# EAGLE board Snare (EAGLE 9.2.2)
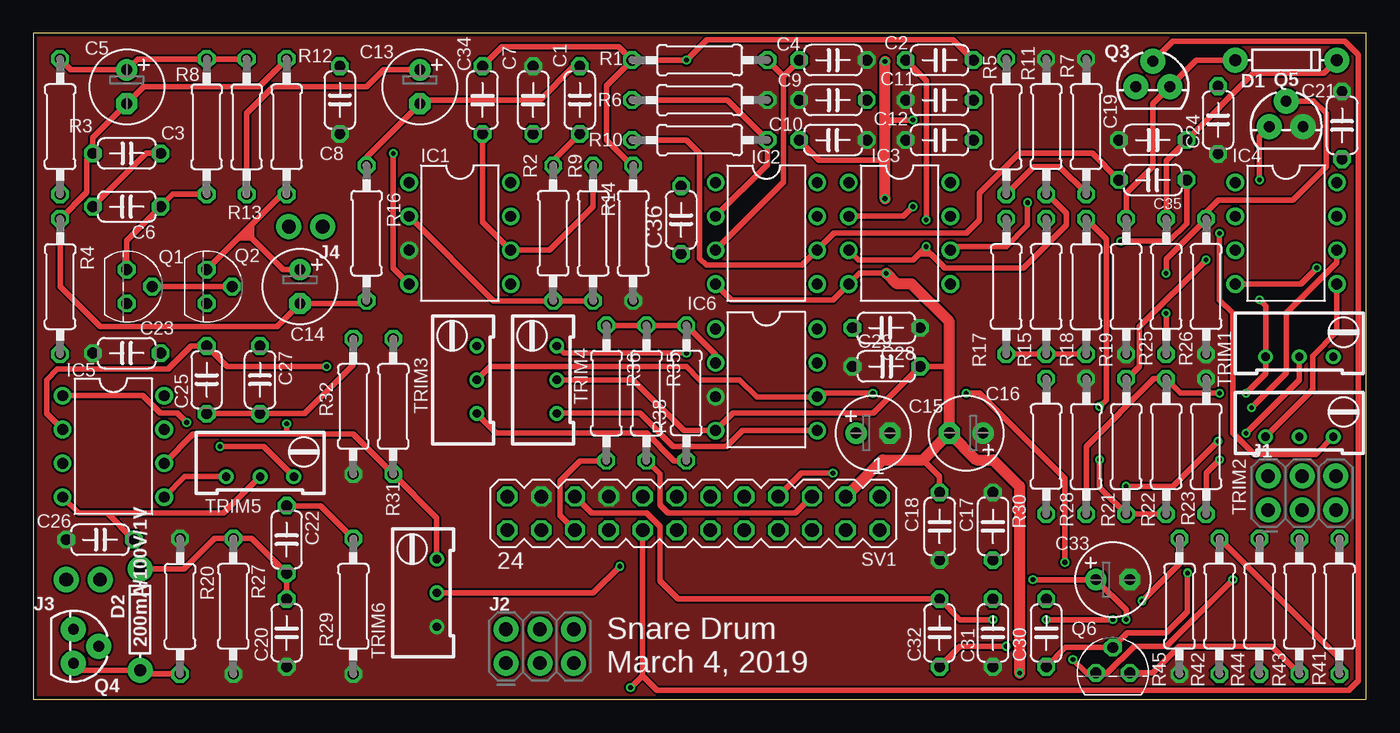
[diagram p0: board, top side]
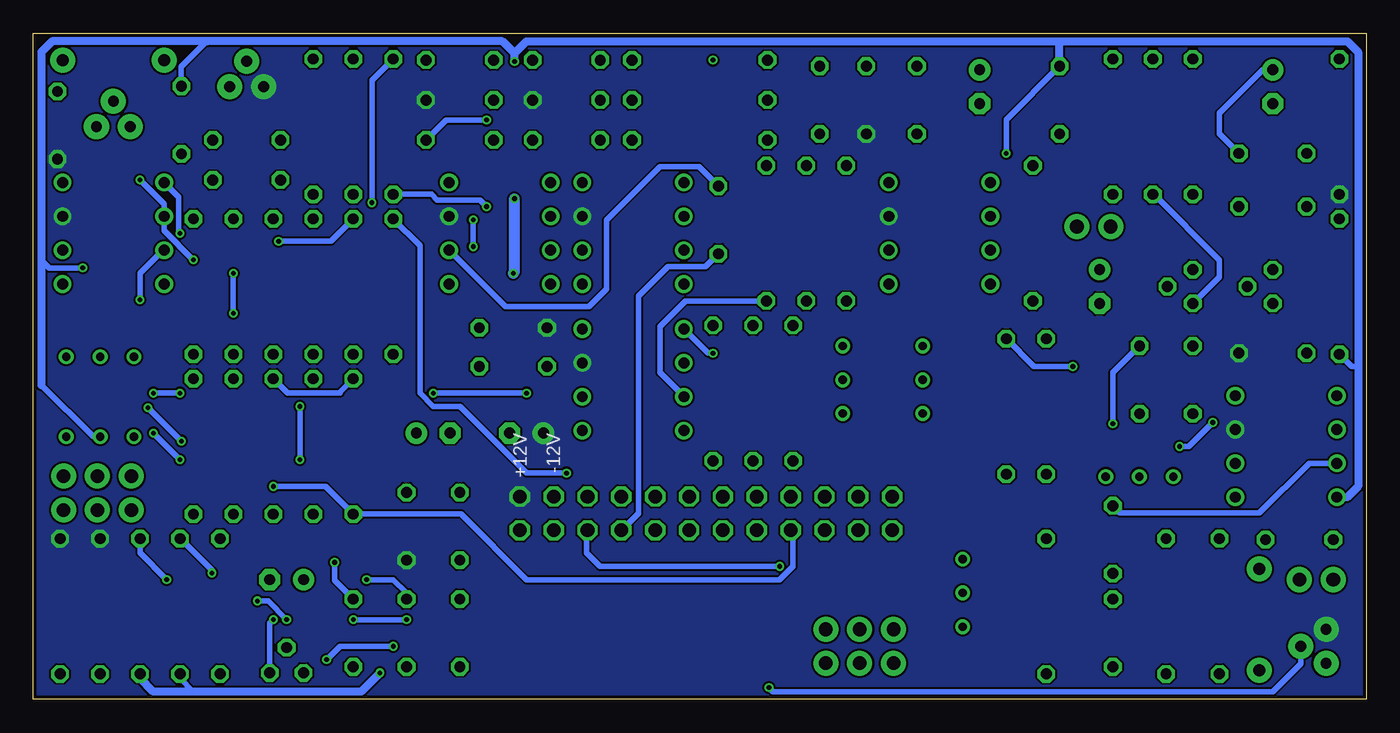
[diagram p1: board, bottom side, seen from below]

Size 100 x 50 mm. Coordinates in mm from the lower left corner, seen from the top.
Outline: 0,0 100,0 100,50 0,50 0,0
Copper layers (1*16): Top 0.035mm / dielectric 1.5mm / Bottom 0.035mm
Design rules "SeeedStudio_2layer_DRU_no_angle_20140221": minimum track width 6mil, minimum drill 12mil, track to track 6mil, track to pad 6mil, pad to pad 6mil, via to via 6mil, smd to smd 0mil, copper to edge 10mil, drill to drill 10mil, minimum pad ring 10mil, minimum via ring 6mil, stop-mask expansion 2mil, vias tented up to drill 100mil, thermal gap 10mil

## Footprints (pad centres in the part's own frame; a part is rotated, then mirrored left to right if it is on the bottom)
C050-024X044 = drill 0.813 octagon: 1 -2.54,0; 2 2.54,0
E2,5-6 = drill 0.813 pad 1.6: + -1.27,0 | drill 0.813 pad 1.6 octagon: - 1.27,0
DIODE-1N4148 = drill 0.9 pad 1.88: A -3.81,0; C 3.81,0
DIL08 = drill 0.813 pad 1.27: 1 -3.81,-3.81; 2 -1.27,-3.81; 3 1.27,-3.81; 4 3.81,-3.81; 5 3.81,3.81; 6 1.27,3.81; 7 -1.27,3.81; 8 -3.81,3.81
2X3-NS = drill 1.016 pad 1.88: 1 -2.54,-1.27; 2 -2.54,1.27; 3 0,-1.27; 4 0,1.27; 5 2.54,-1.27; 6 2.54,1.27
1X02_NO_SILK = drill 1.016 pad 1.88: 1 0,0; 2 2.54,0
TO92 = drill 0.813 octagon: 1 1.27,0; 2 0,1.905; 3 -1.27,0
TO-92 = drill 0.813 pad 1.88: 1 -1.27,0; 2 0,1.905; 3 1.27,0
0207/10 = drill 0.813 octagon: 1 -5.08,0; 2 5.08,0
MA12-2 = drill 1.016 octagon: 1 -13.97,-1.27; 2 -13.97,1.27; 3 -11.43,-1.27; 4 -11.43,1.27; 5 -8.89,-1.27; 6 -8.89,1.27; 7 -6.35,-1.27; 8 -6.35,1.27; 9 -3.81,-1.27; 10 -3.81,1.27; 11 -1.27,-1.27; 12 -1.27,1.27; 13 1.27,-1.27; 14 1.27,1.27; 15 3.81,-1.27; 16 3.81,1.27; 17 6.35,-1.27; 18 6.35,1.27; 19 8.89,-1.27; 20 8.89,1.27; 21 11.43,-1.27; 22 11.43,1.27; 23 13.97,-1.27; 24 13.97,1.27
RTRIM64W = drill 0.61: 1 1.27,-2.54; 2 1.27,0; 3 1.27,2.54

## Placement (x,y rotation side)
C1  0.1uF  [C050-024X044]  41,45 90 top
C2  1nF  [C050-024X044]  68,48 0 top
C3  10uF  [E2,5-6]  7,46 270 top
C4  1nF  [C050-024X044]  60,48 0 top
C5  0.1uF  [C050-024X044]  7,41 0 top
C6  0.1uF  [C050-024X044]  7,37 180 top
C7  0.1uF  [C050-024X044]  37.5,45 270 top
C8  0.1uF  [C050-024X044]  23,45 90 top
C9  0.1uF  [C050-024X044]  60,45 0 top
C10  0.1uF  [C050-024X044]  60,42 180 top
C11  0.1uF  [C050-024X044]  68,45 0 top
C12  0.1uF  [C050-024X044]  68,42 0 top
C13  10uF  [E2,5-6]  29,46 270 top
C14  10uF  [E2,5-6]  20,31 270 top
C15  10uF  [E2,5-6]  63,20 0 top
C16  10uF  [E2,5-6]  70,20 180 top
C17  1u  [C050-024X044]  72,13 270 top
C18  1u  [C050-024X044]  68,13 270 top
C19  0.33uF  [C050-024X044]  84,42 0 top
C20  0.33uF  [C050-024X044]  19,5 90 top
C21  0.1uF  [C050-024X044]  98.2,43.1 270 top
C22  0.1uF  [C050-024X044]  19,12 270 top
C23  0.1uF  [C050-024X044]  7,26 180 top
C24  0.1uF  [C050-024X044]  88.9,43.5 90 top
C25  33nF  [C050-024X044]  13,24 90 top
C26  0.1uF  [C050-024X044]  5,12 0 top
C27  33nF  [C050-024X044]  17,24 270 top
C28  0.1uF  [C050-024X044]  64,27.9 180 top
C29  0.1uF  [C050-024X044]  64,25 0 top
C30  2.2u  [C050-024X044]  76,5 90 top
C31  1u  [C050-024X044]  72,5 270 top
C32  2.2u  [C050-024X044]  68,5 90 top
C33  10uF  [E2,5-6]  81,9 0 top
C34  0.1uF  [C050-024X044]  33.7,45 270 top
C35  0.1uF  [C050-024X044]  84,39 180 top
C36  0.1uF  [C050-024X044]  48.6,36 90 top
D1  200mA/100V/1V  [DIODE-1N4148]  94,48 0 top
D2  200mA/100V/1V  [DIODE-1N4148]  8,6 90 top
IC1  LM741P  [DIL08]  32,35 270 top
IC2  LM741P  [DIL08]  55,35 270 top
IC3  LM741P  [DIL08]  65,35 270 top
IC4  LM741P  [DIL08]  94,35 270 top
IC5  LM741P  [DIL08]  6,19 270 top
IC6  LM741P  [DIL08]  55,24 270 top
J1  [2X3-NS]  95.2,15.5 0 top
J2  [2X3-NS]  38,4 0 top
J3  [1X02_NO_SILK]  5,9 180 top
J4  [1X02_NO_SILK]  21.7,35.5 180 top
Q1  2N3904  [TO92]  7,31 270 top
Q2  2N3904  [TO92]  13,31 270 top
Q3  2N2222A  [TO-92]  84,46 0 top
Q4  2N2222A  [TO-92]  3,4 270 top
Q5  J176  [TO-92]  94,43 0 top
Q6  2N3904  [TO92]  81,2 0 top
R1  15k  [0207/10]  50,48 0 top
R2  47k  [0207/10]  39,35 90 top
R3  2k  [0207/10]  2,43 90 top
R4  2k  [0207/10]  2,31 270 top
R5  15k  [0207/10]  76,43 90 top
R6  2k  [0207/10]  50,45 0 top
R7  4.7k  [0207/10]  79,43 90 top
R8  680k  [0207/10]  13,43 270 top
R9  100k  [0207/10]  42,35 270 top
R10  10k  [0207/10]  50,42 0 top
R11  2k  [0207/10]  73,43 270 top
R12  4.7k  [0207/10]  16,43 270 top
R13  1k  [0207/10]  19,43 90 top
R14  100k  [0207/10]  45,35 270 top
R15  10k  [0207/10]  76,31 90 top
R16  100k  [0207/10]  25,35 270 top
R17  10k  [0207/10]  73,31 90 top
R18  10k  [0207/10]  79,31 270 top
R19  470k  [0207/10]  82,31 90 top
R20  470k  [0207/10]  11,7 270 top
R21  10k  [0207/10]  82,19 270 top
R22  10k  [0207/10]  85,19 270 top
R23  100  [0207/10]  88,19 270 top
R25  51k  [0207/10]  85,31 90 top
R26  47k  [0207/10]  88,31 90 top
R27  100k  [0207/10]  15,7 90 top
R28  10k  [0207/10]  79,19 270 top
R29  1k  [0207/10]  24,7 90 top
R30  10k  [0207/10]  76,19 90 top
R31  1meg  [0207/10]  27,22 90 top
R32  1k  [0207/10]  24,22 90 top
R35  10k  [0207/10]  46,23 270 top
R36  10k  [0207/10]  43,23 270 top
R38  1k  [0207/10]  49,23 90 top
R41  10k  [0207/10]  98,7 90 top
R42  10k  [0207/10]  89,7 90 top
R43  220  [0207/10]  95,7 90 top
R44  10k  [0207/10]  92,7 90 top
R45  47k  [0207/10]  86,7 90 top
SV1  [MA12-2]  49.53,13.97 180 top
TRIM1  20 OHM  [RTRIM64W]  95,27 270 top
TRIM2  10k  [RTRIM64W]  95,21 270 top
TRIM3  10k  [RTRIM64W]  32,24 0 top
TRIM4  10k  [RTRIM64W]  38,24 0 top
TRIM5  10k  [RTRIM64W]  17,18 270 top
TRIM6  10k  [RTRIM64W]  29,8 0 top

## Library data of the parts
C1 C2 C4-C12 C17-C32 C34-C36 R1-R23 R25-R32 R35 R36 R38 R41-R45 = resistor
C3 C13-C16 C33 = rcl; SPICEPREFIX: C
D1 D2 = SparkFun-DiscreteSemi; PROD_ID: DIO-08378
IC1-IC6 = linear
J1-J4 = SparkFun-Connectors
Q1 Q2 Q6 = transistor
Q3 Q4 = SparkFun-DiscreteSemi; PROD_ID: TRANS-09536
Q5 = Capstone
SV1 = con-lstb; OC_FARNELL: unknown; OC_NEWARK: unknown
TRIM1-TRIM6 = rcl; SPICEMODEL: X; SPICEPREFIXL: POT

## Nets
+5V: SV1.2
+12V: C7.2 C9.2 C11.2 C15.+ C17.2 C21.2 C23.1 C28.2 IC1.7 IC2.7 IC3.7 IC4.7 IC5.7 IC6.7 Q3.1 Q4.1 R3.1 R41.2 R43.2 SV1.1
-12V: C8.2 C10.2 C12.2 C16.- C18.1 C24.2 C26.2 C29.2 IC1.4 IC2.4 IC3.4 IC4.4 IC5.4 IC6.4 R4.2 R42.1 R44.1 SV1.3 TRIM2.2 TRIM4.2 TRIM5.2
AGND: C4.2 C7.1 C8.1 C9.1 C10.1 C11.1 C12.1 C15.- C16.+ C17.1 C18.2 C19.1 C20.1 C21.1 C23.2 C24.1 C26.1 C28.1 C29.1 C31.2 C33.- IC1.3 IC6.3 Q5.3 R5.2 R6.2 R7.2 R14.2 R19.1 R20.1 R23.1 R26.1 R27.1 R28.1 R29.1 R32.1 R45.1 SV1.17 SV1.21 TRIM6.1
CC_INPUT: C30.2 IC6.6 TRIM3.2
DGND: SV1.4
DRUM_OUTPUT: C27.1 IC5.6 R31.1 TRIM6.3
HIGH_FREQ_WN: C36.2 IC3.6 R11.1
LOW_FREQ_WN: C35.2 IC2.6 R10.1
N$1: R15.1 R17.1 R18.2
N$2: IC6.2 R35.1 R36.1 R38.2
N$3: R38.1 TRIM3.1
N$4: IC6.5 TRIM4.1
N$5: C14.+ Q2.3 R13.1
N$6: C3.+ C5.2 C6.2 R3.2 R8.1 R12.1
N$7: IC6.1 TRIM4.3
N$8: C25.1 C27.2 R32.2
N$9: C34.2 IC1.6 R9.1
N$10: C35.1 R15.2
N$17: Q1.2 Q2.2
N$20: C6.1 Q1.3 R8.2
N$21: C3.- C5.1 C14.- R4.1 R13.2 R16.2
N$23: IC1.2 R2.1 R9.2
N$24: SV1.23
N$25: SV1.24
N$26: SV1.22
N$27: IC3.2 R7.1 R11.2
N$28: C1.1 R2.2
N$30: C13.+ Q2.1 R12.2
N$32: C2.1 IC3.3 R5.1
N$33: IC2.2 R6.1 R10.2
N$34: C4.1 IC2.3 R1.2
N$36: C20.2 C22.2 D2.C R27.2
N$37: C30.1 Q6.2 R41.1 R42.2
N$38: C32.1 Q6.3 R44.2
N$39: C31.1 C33.+ Q6.1 R43.1
N$40: D2.A Q4.3 R20.2
N$41: C22.1 IC5.3 R29.2
N$42: R23.2 TRIM1.2
N$43: C25.2 IC5.2 R31.2
N$45: IC5.1 TRIM5.3
N$46: IC5.5 TRIM5.1
N$48: IC4.3 R22.1 R28.2 TRIM1.1
N$49: IC4.2 Q5.1 R21.1 R30.2
N$50: IC4.1 TRIM2.3
N$51: C19.2 D1.C R25.2
N$52: IC4.5 TRIM2.1
N$53: D1.A Q3.3 R19.2
OUTPUT: C32.2 R45.2 SV1.19
POT1A: SV1.6 TRIM6.2
POT1B: R35.2 SV1.5
POT2A: C36.1 SV1.8
POT2B: R17.2 SV1.7
POT3A: SV1.10
POT3B: SV1.9
POT4A: SV1.12
POT4B: SV1.11
POT5A: SV1.14
POT5B: SV1.13
SW1: IC4.6 R30.1 SV1.18
SW2: R36.2 SV1.20
SW3: SV1.15
TRIGGER: Q3.2 Q4.2 SV1.16
VCA_INPUT: R18.1 R21.2 R22.2
VCA_TRIGGER: Q5.2 R25.1 R26.2
WHITE_NOISE: C1.2 C13.- R16.1
WHITE_NOISE_AMP: C2.2 C34.1 R1.1 R14.1

## Tracks (layer width: path | path; a pad name or v marks a point on that pad's centre or on a via)
+12V
  pour Bottom (no thermals): -2,52 102,52 102,-2 -2,-2
-12V  (via drill 0.35)
  Top 0.406: C10.2 58.96,40.5 63.9,40.5 | v66,43.5 64.4,43.5 63.9,43 | v96.3,32.4 95.09,31.19 IC4.4 | 68.73,25 C29.2 63.04,21.5 52.5,21.5 IC6.4 48.81,20.19 45,24 TRIM4.2 | v64,32 62,32 IC3.4 60,30 52.38,30 IC2.4 | 66.73,18 68,16.73 C18.1 | TRIM5.2 14.27,14 5.54,14 | IC5.4 3.38,14 5.54,14 | C26.2 5.54,14 | v27,41 27,32.38 IC1.4
  Top 0.813: SV1.3 63.72,18 66.73,18 C16.- | C16.- 68.73,25 68.73,28.37 65.9,31.2 64.8,31.2 v64,32 | v63.9,37.6 63.9,40.5 63.9,43 v63.9,47.9 | C16.- 70.73,18 72,18 74,16 v74,2
  Bottom 0.406: C12.2 69.04,43.5 v66,43.5 | C24.2 88.9,47.5 87,49.4 | 99.4,33 98.8,32.4 v96.3,32.4 | 99.4,23.6 95.53,19.73 TRIM2.2 | R42.1 89,1.6 88,0.6 | R4.2 1.08,25 0.6,25 | C8.2 27,43.54 v27,41
  Bottom 0.61: 63.9,48.5 64.8,49.4 87,49.4 98.6,49.4 99.4,48.6 99.4,33 99.4,23.6 | v74,2 75.4,0.6 88,0.6 91,0.6 92,1.6 R44.1 | v63.9,47.9 63.9,48.5 | 63.9,48.5 63,49.4 23,49.4 | 23,49.4 1.4,49.4 0.6,48.6 0.6,25 0.6,16 1.41,15.19 IC5.4 | C8.2 23,49.4
  Bottom 0.813: v64,32 63.9,32.1 v63.9,37.6
AGND
  Bottom 0.406: R14.2 51.08,29.92 53,28 53,24.54 IC6.3
  pour Top (no thermals): -1,51 -1,-1 101,-1 101,51
CC_INPUT  (via drill 0.35)
  Top 0.406: v63,23 59.08,23 IC6.6 58.78,22.7 54.3,22.7 53,24 50,24 49,25 34.27,25 TRIM3.2 | v70,23 71,23 77.4,16.6 v77.4,10.3
  Bottom 0.406: v63,23 v70,23 | v77.4,10.3 77.4,8.94 C30.2
DRUM_OUTPUT  (via drill 0.35)
  Top 0.406: TRIM6.3 30.27,13.65 R31.1 24,19.92 19,19.92 | IC5.6 12,19.92 19,19.92 | v19,20.7 19,19.92
  Bottom 0.406: C27.1 19,24.54 v19,20.7
HIGH_FREQ_WN  (via drill 0.35)
  Top 0.406: IC3.6 69.08,34 73,34 74.6,35.6 v74.6,37.3
  Bottom 0.406: C36.2 50.06,40 53,40 57,36 57,30.8 58.3,29.5 64.58,29.5 IC3.6 | v74.6,37.3 74.6,46.48 R11.1
LOW_FREQ_WN
  Top 0.406: R10.1 49,42 50,41 50,33.1 50.5,32.6 57.68,32.6 IC2.6 60.08,35 70,35 71,36 71,38 74,41 79.46,41 C35.2
N$1
  Top 0.406: R17.1 R15.1 R18.2
N$2
  Top 0.406: R36.1 R35.1 R38.2 51.19,25.89 IC6.2
N$3
  Top 0.406: R38.1 48.08,17.92 46,20 34.73,20 TRIM3.1
N$4
  Top 0.406: IC6.5 53.19,20.19 52,19 48,19 45.5,21.5 39.31,21.5 TRIM4.1
N$5
  Top 0.406: Q2.3 15.27,34.53 15.37,34.63 | 15.37,34.63 15.87,35.13 | 16.36,35.63 18.65,37.92 R13.1 | C14.+ 18.73,32.27 16.36,34.63 | 16.36,34.63 15.87,35.13 | 15.87,35.13 16.36,35.63 | 16.36,35.63 16.36,34.63 | 16.36,34.63 15.37,34.63
N$6
  Top 0.406: R3.2 2.81,47.27 C3.+ 7.81,48.08 R8.1 R12.1 | C6.2 8.46,41 C5.2
  Bottom 0.406: C5.2 11,42.46 11,44 7.73,47.27 C3.+
N$7  (via drill 0.35)
  Top 0.406: v49,26 39.81,26 TRIM4.3
  Bottom 0.406: IC6.1 49.38,26 v49,26
N$8
  Top 0.406: R32.2 24,25.1 20.36,21.46 C27.2 C25.1
N$9
  Top 0.406: C34.2 33.7,35.84 IC1.6 38.73,33.73 42,37 R9.1
N$10  (via drill 0.35)
  Top 0.406: C35.1 86.54,35.74 85.2,34.4 v81.6,34.4
  Bottom 0.406: v81.6,34.4 77.68,34.4 R15.2
N$17
  Top 0.406: Q1.2 Q2.2
N$20
  Top 0.406: R8.2 10.46,37.92 C6.1 7,34.46 Q1.3
N$21
  Top 0.406: R13.2 16.92,46 8.27,46 C3.- 4.46,42.19 C5.1 4,40.54 4,38.08 R4.1 2,31 5,28 18.27,28 C14.- 24.81,29.73 R16.2
N$23
  Top 0.406: R9.2 R2.1 34.54,29.92 IC1.2
N$27  (via drill 0.35)
  Top 0.406: R11.2 75.08,40 77,40 79,38 R7.1 | v66,37 65.27,36.27 IC3.2
  Bottom 0.406: R11.2 70.12,37.92 69.7,37.5 66.5,37.5 v66,37
N$28
  Top 0.406: C1.1 39,40.46 R2.2
N$30
  Top 0.406: R12.2 16,44 18,46 25,46 26.27,47.27 C13.+
  Bottom 0.406: Q2.1 11,31.73 11,33 15.92,37.92 R12.2
N$32  (via drill 0.35)
  Top 0.406: C2.1 67,46.46 v67,36 | IC3.3 61.92,33 66,33 66.45,33.45 | R5.1 76.08,37.92 77.5,36.5 77.5,35.6 74.3,32.4 68.4,32.4 67.35,33.45 | 67.35,33.45 67,33.8 v67,34 66.45,33.45 | 66.45,33.45 67.35,33.45
  Bottom 0.406: v67,36 v67,34
N$33
  Top 0.406: R6.1 52.08,45 R10.2 55.08,40.16 IC2.2
N$34
  Top 0.406: R1.2 56.3,46.78 | IC2.3 56.3,38.84 56.3,46.78 | 56.3,46.78 57.46,47.94 C4.1
N$36
  Top 0.406: D2.C 11.31,9.81 13.6,12.1 14.98,12.1 R27.2 16.38,12.08 C22.2 C20.2
N$37  (via drill 0.35)
  Top 0.406: R42.2 98,3.08 R41.1 | v86.6,9.5 86.6,6.6 85,5 82.09,5 Q6.2 77.44,3.9 C30.1
  Bottom 0.406: R42.2 86.6,9.68 v86.6,9.5
N$38  (via drill 0.35)
  Top 0.406: v78,3 79,2 Q6.3 80.6,2 82.6,4 85,4 v90,9 | v73,4 69.54,4 C32.1
  Bottom 0.406: v78,3 77,4 v73,4 | v90,9 92,11 R44.2
N$39  (via drill 0.35)
  Top 0.406: R43.1 92.92,4 86,4 84,2 Q6.1 | v82,6 82,6.73 C33.+ v75,9
  Bottom 0.406: Q6.1 82.27,5.73 v82,6 | v75,9 73,9 72,8 C31.1
N$40
  Top 0.406: Q4.3 3.54,2.19 D2.A 8.27,1.92 R20.2
N$41
  Top 0.406: R29.2 21.54,14.54 C22.1
  Bottom 0.406: C22.1 18.46,14 8,14 4.27,17.73 IC5.3
N$42  (via drill 0.35)
  Top 0.406: TRIM1.2 95,24 v91,20 | v89,18 88,17 R23.2
  Bottom 0.406: v91,20 v89,18
N$43  (via drill 0.35)
  Top 0.406: v22,25 14.54,25 C25.2 11.84,26.54 10.1,24.8 1.8,24.8 1,24 1,21.46 IC5.2
  Bottom 0.406: R31.2 24.92,25 v22,25
N$45  (via drill 0.35)
  Top 0.406: IC5.1 8.19,22.81 9.5,21.5 10.8,21.5 v11.5,20.8 | v14,19 17.27,19 TRIM5.3
  Bottom 0.406: v11.5,20.8 13.3,19 v14,19
N$46
  Top 0.406: IC5.5 11.35,16.73 TRIM5.1
N$48  (via drill 0.35)
  Top 0.406: v92,30 92.46,29.54 TRIM1.1 92.46,24.46 v91,23 | v89,23 86.08,23 R22.1 84.08,24.08 79,19 R28.2
  Bottom 0.406: IC4.3 90.27,33.73 92,32 v92,30 | v91,23 v89,23
N$49  (via drill 0.35)
  Top 0.406: Q5.1 92,42.27 v92,39 | v88,33 83,28 83,25 82.08,24.08 R21.1
  Bottom 0.406: v88,33 90.19,35.19 IC4.2 90.19,37.19 v92,39 | R21.1 80.92,23 77,23 77,23.08 R30.2
N$50  (via drill 0.35)
  Top 0.406: v89,35 89,30 90,29 90,20 91.6,18.4 96.21,18.4 TRIM2.3
  Bottom 0.406: v89,35 89.1,35.1 89.1,37.72 IC4.1
N$51
  Top 0.406: R25.2 85,40.46 C19.2 91.54,47 96.81,47 D1.C
N$52
  Top 0.406: IC4.5 97.81,27.61 96,25.8 96,23.27 TRIM2.1
N$53
  Top 0.406: D1.A 87.27,48 Q3.3 84,44.73 84,40 82,38 R19.2
OUTPUT  (via drill 0.35)
  Top 0.406: R45.2 86,10.2 v83.2,7.4 | v81,6 v76,6 | v72,6 69.54,6 C32.2 48.36,7.54 47,8.9 47,13 46,14 41.88,14 SV1.19
  Bottom 0.406: v83.2,7.4 82.4,7.4 v81,6 | v76,6 v72,6
POT1A  (via drill 0.35)
  Top 0.406: TRIM6.2 42,8 v44,10
  Bottom 0.406: SV1.6 58.5,12.62 58.5,11 57.5,10 v44,10
POT1B
  Top 0.406: R35.2 47,16.92 47,14.6 47.6,14 57.18,14 SV1.5
POT2A
  Bottom 0.406: C36.1 49.56,32.5 52.4,32.5 54.6,30.3 54.6,13.98 SV1.8
POT2B  (via drill 0.35)
  Top 0.406: v60,17 57.64,17 SV1.7
  Bottom 0.406: R17.2 71,34.08 71,23 70,22 68,22 63,17 v60,17
SW1  (via drill 0.35)
  Top 0.406: IC4.6 97.81,32.81 94,29 94,24.5 v91.4,21.9 | v88.9,19.4 85.5,16 v82,16
  Bottom 0.406: v91.4,21.9 v88.9,19.4 | v82,16 78.08,16 R30.1 67.92,13.92 63,9 44,9 43,10 43,12.52 SV1.18
SW2
  Top 0.406: R36.2 41.02,17.92 39.5,16.4 39.5,13.84 SV1.20
TRIGGER  (via drill 0.35)
  Top 0.406: Q3.2 85.5,49.4 98.4,49.4 99.4,48.4 99.4,1.4 98.7,0.7 46.8,0.7 45.7,1.8 | 45.7,1.8 45.7,12.68 SV1.16 | v44.8,0.9 45.7,1.8
  Bottom 0.406: Q4.2 4.91,2.69 7,0.6 44.5,0.6 v44.8,0.9
VCA_INPUT  (via drill 0.35)
  Top 0.406: R22.2 R21.2 80,15.92 v80,18 | v80,22 80.5,22.5 80.5,34.58 R18.1
  Bottom 0.406: v80,22 v80,18
VCA_TRIGGER  (via drill 0.35)
  Top 0.406: Q5.2 96.09,44.91 97,44 97,40 94.5,37.5 88.9,37.5 88,36.6 R26.2 85,33.08 v85,32 | v85,29 R25.1
  Bottom 0.406: v85,32 v85,29
WHITE_NOISE
  Top 0.406: R16.1 25,40.73 C13.- 29.27,45 38,45 40.54,47.54 C1.2
WHITE_NOISE_AMP  (via drill 0.35)
  Top 0.406: C34.1 35.16,49 43.92,49 R1.1 | R1.1 v49,48 50.54,49.54 69,49.54 C2.2 | R1.1 43,46.08 43,42 44.92,40.08 R14.1

## Text on the board
tPlace: Snare Drum / March 4, 2019
bNames: -12V | +12V